# Altium PCB 心率仪电路板.PcbDoc
Units mm, origin at the board's own origin, x right, y up, seen from the top; angles counter-clockwise.
Board outline 54 x 94 mm, 2 copper layers (Top Layer, Bottom Layer); 18 components, 65 nets, 58 pads, 0 vias.
Unrouted connection lines stored in the file: 16.
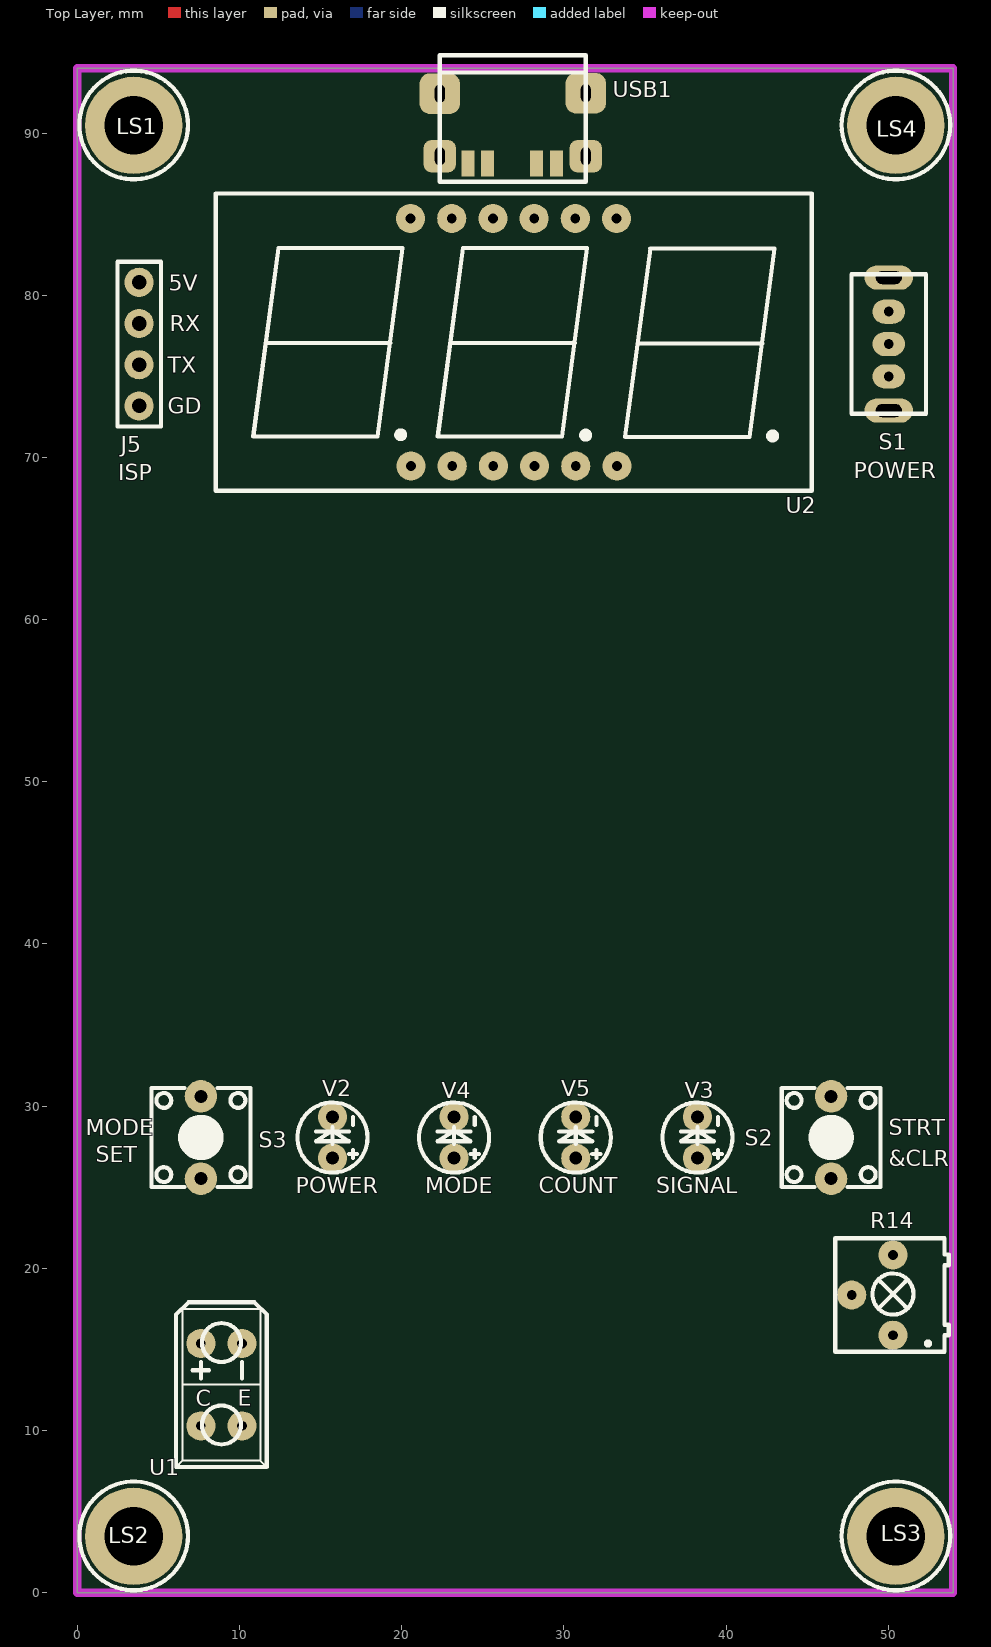
[diagram p0: Top Layer view]
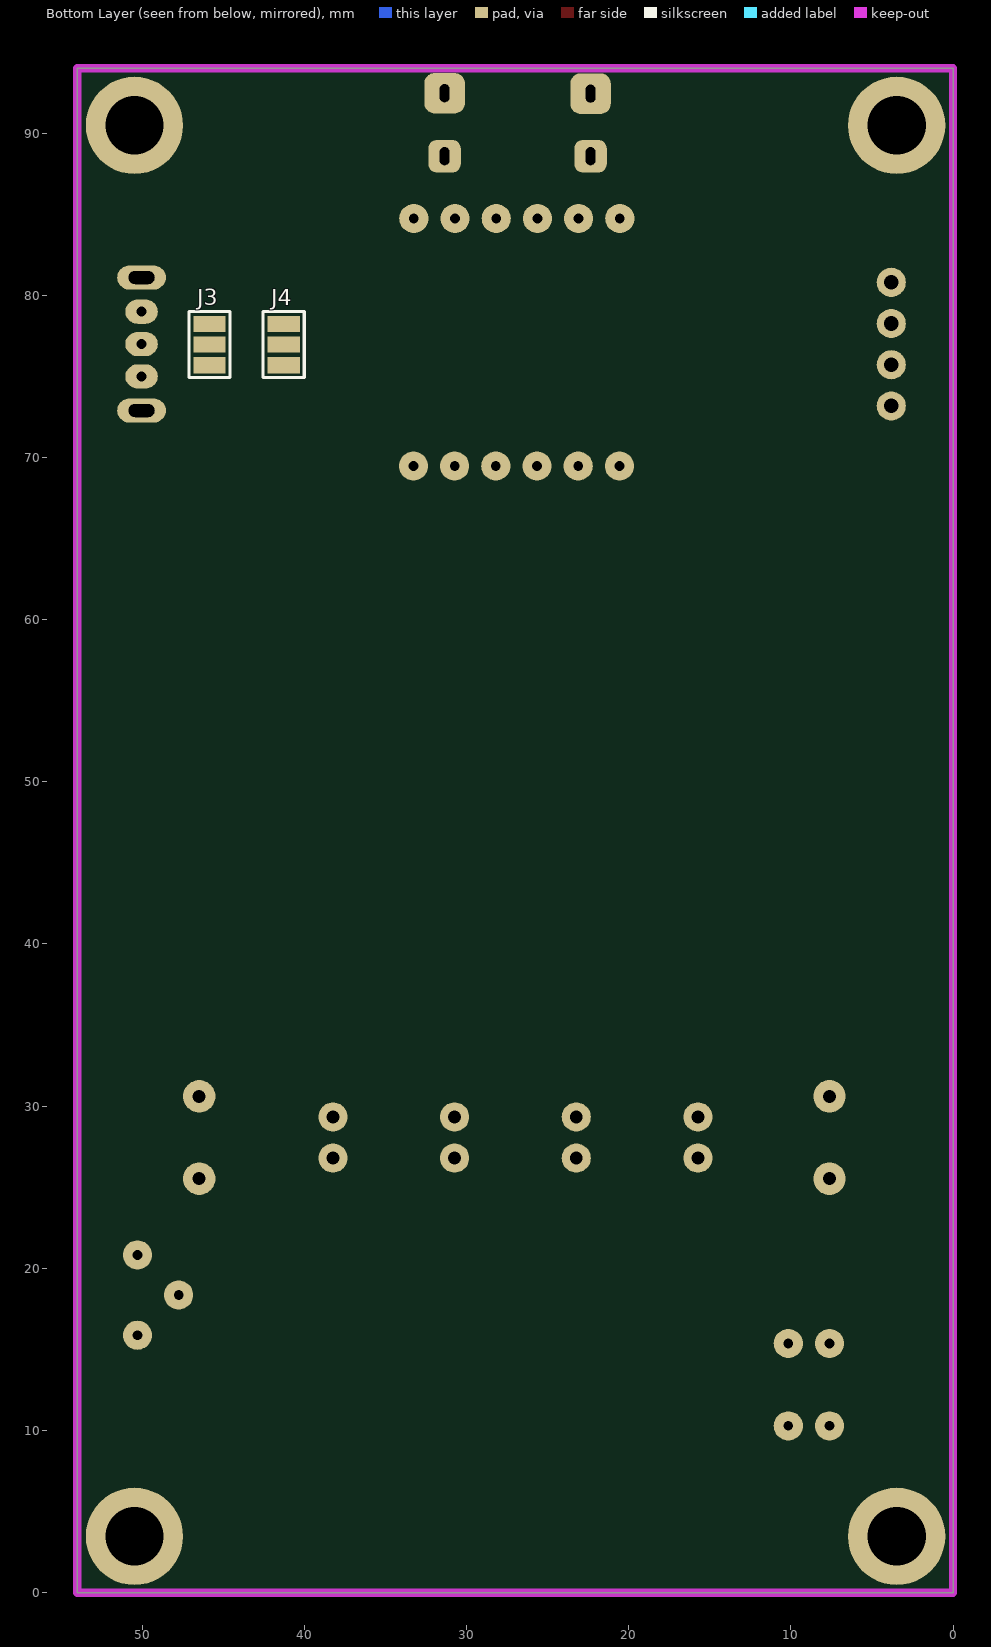
[diagram p1: Bottom Layer view, seen from below]

## Layer stack, top to bottom
Top Layer: signal copper 0.0356
Dielectric: dielectric 0.32, FR-4, Dk 4.8
Bottom Layer: signal copper 0.0356

## Board outline
0,0 54,0 54,94 0,94

## Design rules (kind name [scope] priority, off if disabled: settings)
Clearance [All] p1: gap=0.3
PolygonConnect [All] p1: connectstyle=Relief reliefconductorwidth=0.254 reliefentries=4 polygonreliefangle="90 Angle"
RoutingVias [All] p1: holewidth=0.5 width=1 viastyle="Through Hole" minholewidth=0.5 minwidth=1 maxholewidth=1 maxwidth=2
SilkscreenOverComponentPads [IsPad] p1: minsilkscreentomaskgap=0.254
SolderMaskExpansion [All] p1: expansion=0.102
TestPointUsage [All] p1: valid=0 allowmultiple=FALSE
Testpoint [All] p1: side=3 testpointundercomponent=TRUE minsize=1.016 maxsize=2.54 preferedsize=1.524 minholesize=0 maxholesize=1.016 preferedholesize=0.813 testpointgrid=0.025 style=297 order=0123456789
Width [All] p1: maxlimit=0.254 minlimit=0.254 preferedwidth=0.254
23 further rules are at their usual default settings.

## Components (designator, comment, footprint, x,y, rotation, side; value= is the part's Value field where it differs from the comment)
J3 "" JUMP3 45.847,78.232 r270 bottom locked (schematic designator J1)
J4 "" JUMP3 41.275,75.692 r90 bottom locked (schematic designator J2)
J5 "ISP" SIP4 3.81,80.797 r270 top locked (schematic designator ISP)
LS1 "TEST" HLS 3.5,90.5 r0 top locked
LS2 "TEST" HLS 3.5,3.5 r0 top locked
LS3 "TEST" HLS 50.5,3.5 r0 top locked
LS4 "TEST" HLS 50.5,90.5 r0 top locked
R14 "10K" 3362P 50.292,15.875 r90 top locked
S1 "" POW3 50.038,78.994 r270 top locked
S2 "START" KEY2 46.482,30.607 r270 top locked
S3 "MODE" KEY2 7.62,25.527 r90 top locked
U1 "" TCRT5000 7.62,10.287 r270 top locked
U2 "" SMG 20.574,69.469 r0 top locked
USB1 "" USBTYPEC6 22.352,88.574 r0 top locked (schematic designator USB)
V2 "LED" LED3 15.734,26.797 r90 top locked (schematic designator V1)
V3 "LED" LED3 38.234,26.797 r90 top locked (schematic designator V2)
V4 "LED" LED3 23.234,26.797 r90 top locked (schematic designator V7)
V5 "LED" LED3 30.734,26.797 r90 top locked (schematic designator V4)

## Footprints (in the part's own frame and the unit in brackets; to place one, negate y for a bottom-side part, rotate by r counter-clockwise, add the part's x,y. Pads: shape width x height; smd on the part's side, far side on the other; paste and mask are expansions set on the pad)
3362P [mm]
  round 1.8 hole 0.6: 1(0,0) 2(2.484,2.54) 3(4.953,0)
  silkscreen extent -1.02,-3.44 5.98,3.56
HLS [mm]
  round 6 hole 3.6: 1(-0.025,-0.025)
  silkscreen extent -3.38,-3.35 3.32,3.35
JUMP3 [mm]
  rect 1x2 smd: 1(0,0) 2(1.27,0) 3(2.54,0)
  silkscreen extent -0.76,-1.27 3.3,1.27
KEY2 [mm]
  round 2 hole 0.8: 1(0,0) 2(5.08,0)
  silkscreen extent -0.51,-3.05 5.59,3.05
LED3 [mm]
  round 1.8 hole 0.8: 1(0,0) 2(2.54,0)
  silkscreen extent -0.89,-2.16 3.43,2.16
POW3 [mm]
  oval 1.5x3 hole 0.8 slot 1.6 at 90 deg: 0(-2.1,0) 0(6.1,0)
  oval 1.5x2 hole 0.6: 1(0,0) 2(2,0) 3(4,0)
  silkscreen extent -2.3,-2.3 6.3,2.3
SIP4 [mm]
  round 1.8 hole 0.9: 1(0,0) 2(2.54,0) 3(5.08,0) 4(7.62,0)
  silkscreen extent -1.27,-1.32 8.89,1.35
SMG [mm]
  round 1.8 hole 0.6: 1(0,0) 2(2.54,0) 3(5.08,0) 4(7.62,0) 5(10.16,0) 6(12.7,0) 7(12.675,15.265) 8(10.135,15.265) 9(7.595,15.265) 10(5.055,15.265) 11(2.515,15.265) 12(-0.025,15.265)
  silkscreen extent -12.04,-1.52 24.71,16.81
TCRT5000 [mm]
  round 1.8 hole 0.6: 1(-5.08,0) 2(-5.08,2.54) 3(0,0) 4(0,2.54)
  silkscreen extent -7.62,-1.54 2.54,4.06
USBTYPEC6 [mm]
  rect 0.8x1.6 smd: 1(1.727,-0.457) 2(2.946,-0.457) 5(5.972,-0.457) 6(7.188,-0.457)
  rrect50% 2x2 hole 0.6 slot 1.1 at 90 deg: 7(0,0) 8(9,0)
  rrect50% 2.5x2.5 hole 0.6 slot 1.1 at 90 deg: 7(0,3.861) 8(9,3.886)
  silkscreen extent 0,-1.57 9,6.22

## Part data
J3 J4: library part "Header 3", "Header, 3-Pin"
J5: library part "Header 4", "Header, 4-Pin"
R14: library part RPot, "Potentiometer"
S1: library part SW-SPST, "Single-Pole, Single-Throw Switch"
S2 S3: library part SW-PB, "Switch"
U1: library part Optoisolator1, "4-Pin Phototransistor Optocoupler"
U2: library part Component_1
USB1: library part "Header 6", "Header, 6-Pin"
V2 V3 V4 V5: library part LED0, "Typical INFRARED GaAs LED"

## Nets (pads, with @x,y where several pads share a name; then routed paths per layer and width w, separated by ;. In a path a pad name is that pad's centre, name@x,y a point inside that pad or via, vN(x,y) a via of type N, cw(c..) or ccw(c..) an arc to the next point about the centre after c; other vN are vias at no path point)
+5.7V: 
+5V: J3.2 S1.2
+5V1: S1.1 USB1.2 USB1.5
+5VA: J3.1 R14.3
+5VD: J3.3 J5.1 V4.1 V5.1
AGND: J4.1 R14.1 U1.2 U1.4
DGND: J4.3 J5.4 S2.1 S3.1 V2.2
GND: J4.2 USB1.1 USB1.6
NetC3_1: U1.3
NetC3_2: 
NetC4_2: 
NetC5_2: 
NetC6_1: 
NetC7_1: 
NetC9_2: 
NetC10_1: 
NetC11_2: 
NetC12_1: 
NetIC1_1: 
NetIC1_2: 
NetIC1_6: R14.2
NetIC1_8: 
NetIC1_9: 
NetIC2_1: S2.2
NetIC2_4: S3.2
NetIC2_8: 
NetIC2_14: 
NetIC2_22: 
NetIC2_25: 
NetIC2_28: 
NetIC2_32: 
NetIC2_33: 
NetIC2_34: 
NetIC2_35: 
NetIC2_36: 
NetIC2_37: 
NetIC2_38: 
NetIC2_39: 
NetIC3_2: 
NetIC3_3: 
NetR1_1: V2.1
NetR2_1: U1.1
NetR15_2: V3.1
NetR19_2: V5.2
NetR20_2: U2.11
NetR21_2: U2.1
NetR22_2: U2.2
NetR23_2: U2.10
NetR24_2: U2.4
NetR25_2: U2.5
NetR26_2: U2.7
NetR27_2: U2.3
NetR28_2: 
NetR29_2: 
NetR30_2: 
NetR31_2: V4.2
NetU2_8: U2.8
NetU2_9: U2.9
NetU2_12: U2.12
P1.4: 
P1.5: 
P1.6: 
P30: J5.2
P31: J5.3
SIGNAL: V3.2
pads on no net: LS1.1 LS2.1 LS3.1 LS4.1 S1.0 S1.3 U2.6 USB1.7 USB1.8

## Keep-outs
Keep-Out Layer:
  the board outline again, w0.5

## Silkscreen, mask and mechanical layers (free items; w line width, h text height)
Top Overlay:
  lines w0.127: 7.62,26.772 7.62,28.042
  lines w0.254: 7.112,13.716 8.128,13.716 ; 7.62,13.208 7.62,14.224 ; 10.16,13.208 10.16,14.224 ; 22.352,93.726 31.242,93.726
  text "5V" at 5.639,80.289 h1
  text "RX" at 5.69,77.775 h1
  text "TX" at 5.563,75.235 h1
  text "GD" at 5.588,72.695 h1
  text "POWER" at 47.879,68.707 h1
  text "MODE" at 0.508,28.194 h1
  text "STRT" at 50.038,28.194 h1
  text "SET" at 1.143,26.543 h1
  text "&CLR" at 50.038,26.289 h1
  text "POWER" at 13.462,24.638 h1
  text "MODE" at 21.463,24.638 h1
  text "COUNT" at 28.462,24.638 h1
  text "SIGNAL" at 35.687,24.638 h1
  text "E" at 9.881,11.532 h1
  text "C" at 7.29,11.506 h1